# EAGLE board uBlox GPS Cape (EAGLE 7.1.0)
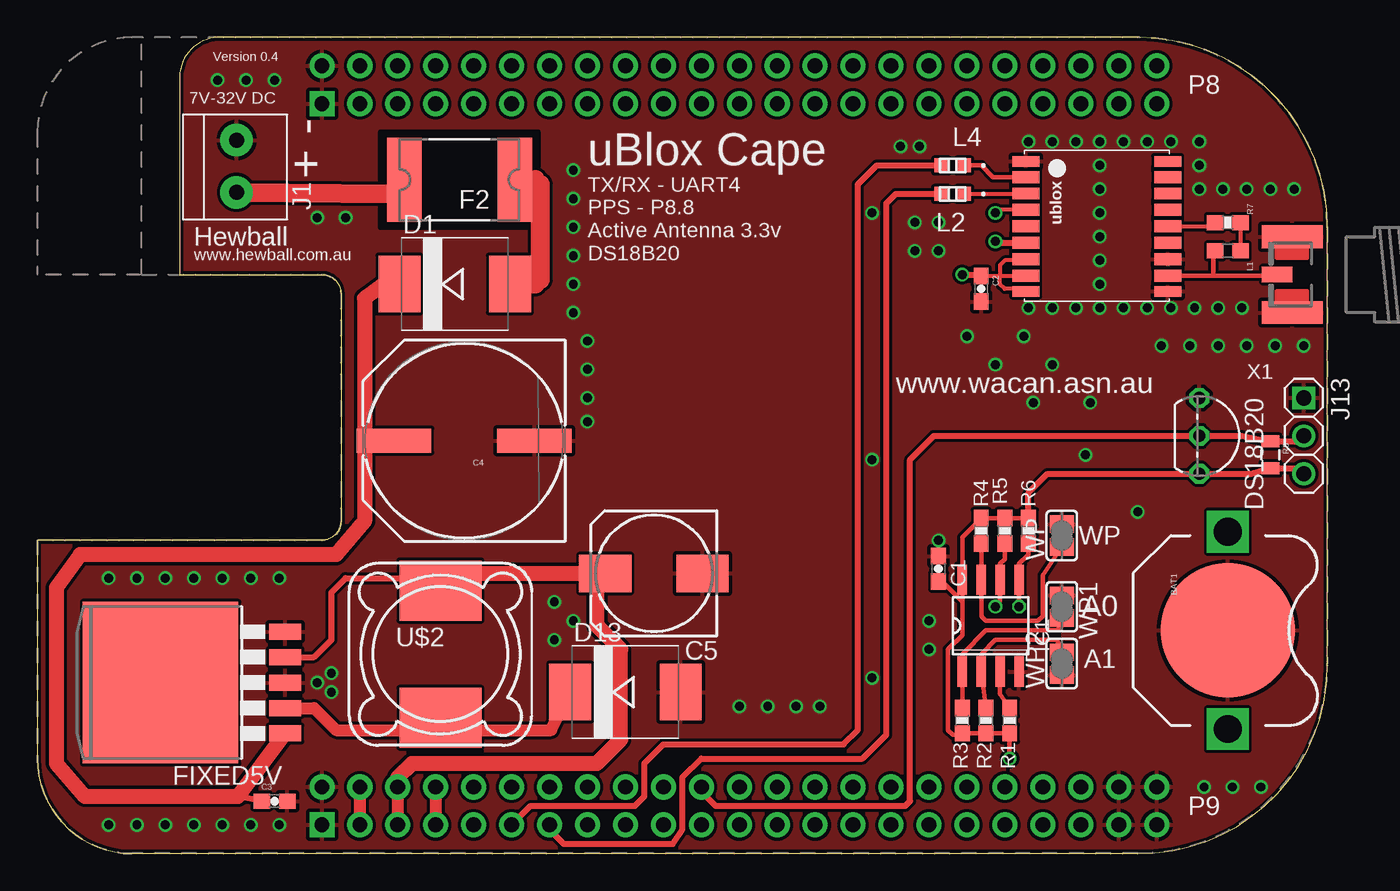
[diagram p0: board, top side]
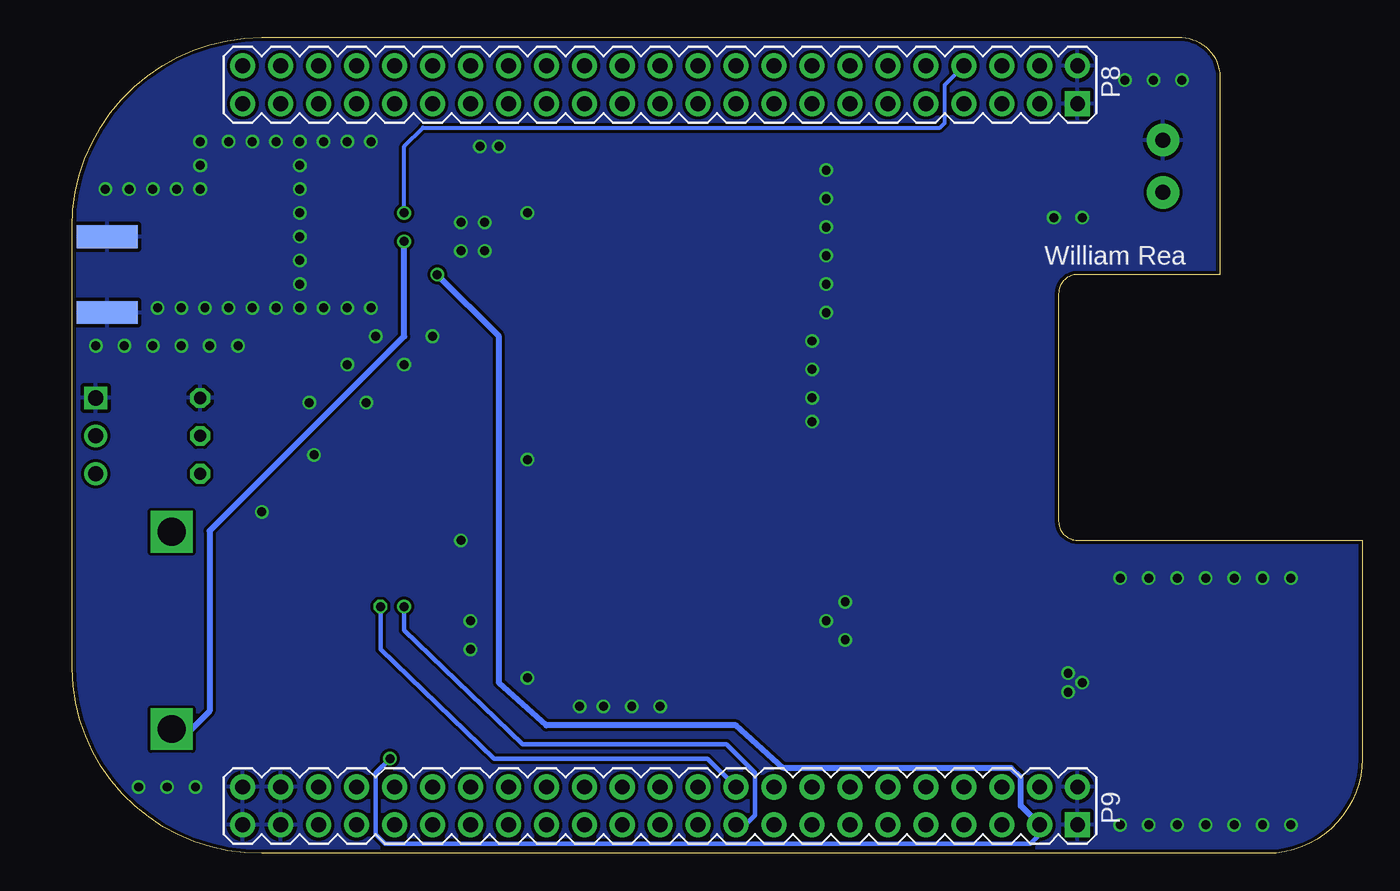
[diagram p1: board, bottom side, seen from below]

Size 86.36 x 54.61 mm. Coordinates in mm from the lower left corner, seen from the top.
Outline: 86.36,41.91 arc90 73.66,54.61 12.06,54.61 arc90 9.53,51.75 9.53,38.73 19.05,38.73 arc-90 20.32,37.47 20.32,22.23 arc-90 19.05,20.95 0,20.95 0,6.35 arc90 6.35,0 73.66,0 arc90 86.36,12.38 86.36,42.23
Copper layers (1*16): Top 0.035mm / dielectric 1.5mm / Bottom 0.035mm
Design rules "Elecrow_2-layer_eagle_rule-2": minimum track width 6mil, minimum drill 12mil, track to track 6mil, track to pad 6mil, pad to pad 6mil, via to via 6mil, smd to smd 0mil, copper to edge 10mil, drill to drill 10mil, minimum pad ring 10mil, minimum via ring 6mil, stop-mask expansion 2mil, vias tented up to drill 100mil, thermal gap 10mil
Net classes: 0 default: width 0.152 mm, drill 0.406 mm, clearance 0.152 mm; 2 gnd: width 0.152 mm, drill 0.406 mm, clearance 0.203 mm; 5 3.3v: width 0.152 mm, drill 0.406 mm, clearance 0.152 mm

## Footprints (pad centres in the part's own frame; a part is rotated, then mirrored left to right if it is on the bottom)
BATTCON_12MM_PTH = smd 9 x 9: GND 0,0 | drill 1.854 square: VCC@1 6.604,0; VCC@2 -6.604,0
BB_CAPE_TOP = drill 1 pad 1.676 square: P8.1 50.165,19.05; P9.1 1.905,19.05 | drill 1 pad 1.676: P8.2 52.705,19.05; P8.3 50.165,21.59; P8.4 52.705,21.59; P8.5 50.165,24.13; P8.6 52.705,24.13; P8.7 50.165,26.67; P8.8 52.705,26.67; P8.9 50.165,29.21; P8.10 52.705,29.21; P8.11 50.165,31.75; P8.12 52.705,31.75; P8.13 50.165,34.29; P8.14 52.705,34.29; P8.15 50.165,36.83; P8.16 52.705,36.83; P8.17 50.165,39.37; P8.18 52.705,39.37; P8.19 50.165,41.91; P8.20 52.705,41.91; P8.21 50.165,44.45; P8.22 52.705,44.45; P8.23 50.165,46.99; P8.24 52.705,46.99; P8.25 50.165,49.53; P8.26 52.705,49.53; P8.27 50.165,52.07; P8.28 52.705,52.07; P8.29 50.165,54.61; P8.30 52.705,54.61; P8.31 50.165,57.15; P8.32 52.705,57.15; P8.33 50.165,59.69; P8.34 52.705,59.69; P8.35 50.165,62.23; P8.36 52.705,62.23; P8.37 50.165,64.77; P8.38 52.705,64.77; P8.39 50.165,67.31; P8.40 52.705,67.31; P8.41 50.165,69.85; P8.42 52.705,69.85; P8.43 50.165,72.39; P8.44 52.705,72.39; P8.45 50.165,74.93; P8.46 52.705,74.93; P9.2 4.445,19.05; P9.3 1.905,21.59; P9.4 4.445,21.59; P9.5 1.905,24.13; P9.6 4.445,24.13; P9.7 1.905,26.67; P9.8 4.445,26.67; P9.9 1.905,29.21; P9.10 4.445,29.21; P9.11 1.905,31.75; P9.12 4.445,31.75; P9.13 1.905,34.29; P9.14 4.445,34.29; P9.15 1.905,36.83; P9.16 4.445,36.83; P9.17 1.905,39.37; P9.18 4.445,39.37; P9.19 1.905,41.91; P9.20 4.445,41.91; P9.21 1.905,44.45; P9.22 4.445,44.45; P9.23 1.905,46.99; P9.24 4.445,46.99; P9.25 1.905,49.53; P9.26 4.445,49.53; P9.27 1.905,52.07; P9.28 4.445,52.07; P9.29 1.905,54.61; P9.30 4.445,54.61; P9.31 1.905,57.15; P9.32 4.445,57.15; P9.33 1.905,59.69; P9.34 4.445,59.69; P9.35 1.905,62.23; P9.36 4.445,62.23; P9.37 1.905,64.77; P9.38 4.445,64.77; P9.39 1.905,67.31; P9.40 4.445,67.31; P9.41 1.905,69.85; P9.42 4.445,69.85; P9.43 1.905,72.39; P9.44 4.445,72.39; P9.45 1.905,74.93; P9.46 4.445,74.93
0603-CAP = smd 1.1 x 1: 1 -0.85,0; 2 0.85,0
PANASONIC_H13 = smd 5 x 1.6: + 4.7,0; - -4.7,0
153CLV-0810 = smd 3.5 x 2.5: + 3.25,0; - -3.25,0
SMC = smd 2.8 x 3.8: A 3.7,0; C -3.7,0
TO92- = drill 0.813 octagon: 1 -2.54,0; 2 0,0; 3 2.54,0
2920 = smd 2.3 x 5.6: 1 -3.7,0; 2 3.7,0
TO263-5 = smd 1.067 x 2.159: 1 -3.404,-5.791; 2 -1.702,-5.791; 3 0,-5.791; 4 1.702,-5.791; 5 3.404,-5.791 | smd 10.8 x 10.41: 6 0,2.54
SO08 = smd 0.66 x 2.032: 1 -1.905,-3.073; 2 -0.635,-3.073; 3 0.635,-3.073; 4 1.905,-3.073; 5 1.905,3.073; 6 0.635,3.073; 7 -0.635,3.073; 8 -1.905,3.073
1X2-3.5MM = drill 1 pad 2.184: 1 1.8,0; 2 -1.7,0
HEADER_1X3 = drill 1.016 square: 1 0,0 | drill 1.016: 2 2.54,0; 3 5.08,0
0603 = smd 1.1 x 1: 1 -0.85,0; 2 0.85,0
IND_BLM18_0603 = smd 0.965 x 0.94: 1 0.749,0; 2 -0.749,0
0603-RES = smd 1.1 x 1: 1 -0.85,0; 2 0.85,0
0805 = smd 0.8 x 1.2: 1 -0.9,0; 2 0.9,0
UBLOX_MAX = smd 1.8 x 0.7: 1_GND 4.95,-4.4; 9_V_RESET 4.95,4.3; 10_GND -4.55,4.3; 18_RESERVED -4.55,-4.4 | smd 1.8 x 0.8: 2_TXD1 4.95,-3.35; 3_RXD1 4.95,-2.25; 4_TIMEPULSE 4.95,-1.15; 5_EXTINT0 4.95,-0.05; 6_V_BCKP 4.95,1.05; 7_VCC_IO 4.95,2.15; 8_VCC 4.95,3.25; 11_RF_IN -4.55,3.25; 12_GND -4.55,2.15; 13_ANTON -4.55,1.05; 14_VCC_RF -4.55,-0.05; 15_RESERVED -4.55,-1.15; 16_SDA2 -4.55,-2.25; 17_SCL2 -4.55,-3.35
MSS1260 = smd 5.5 x 4: P$1 0,4.25; P$2 0,-4.25
SJ = smd 1.168 x 1.6: 1 -0.762,0; 2 0.762,0
SMA_EDGELAUNCH_UFL = smd 4.064 x 1.524: GND@1 2.032,-2.54; GND@2 2.032,2.54 | smd 4.064 x 1.524 bottom: GND@3 2.032,2.54; GND@4 2.032,-2.54 | smd 2.032 x 1.016: P 3.048,0

## Placement (x,y rotation side)
BAT1  [BATTCON_12MM_PTH]  79.69,14.92 270 top
BB1  BBH2  [BB_CAPE_TOP]  0,0 90 bottom
C1  0.1uF  [0603-CAP]  60.33,19.05 90 top
C2  0.1uF  [0603-CAP]  63.18,37.78 270 top
C3  0.1uF  [0603-CAP]  15.88,3.49 0 top
C4  680uF  [PANASONIC_H13]  28.57,27.62 180 top
C5  220uF  [153CLV-0810]  41.27,18.73 180 top
D1  SS34  [SMC]  27.94,38.1 0 top
D13  SS34  [SMC]  39.37,10.79 0 top
DS18B20  DS18B20  [TO92-]  77.79,27.94 270 top
F2  PTC  [2920]  28.26,45.09 180 top
FIXED5V  LM2596SX-5.0  [TO263-5]  10.79,11.43 90 top
IC1  24LC256  [SO08]  63.82,15.24 0 top
J1  1X2-3.5MM  [1X2-3.5MM]  13.34,46.04 270 top
J13  [HEADER_1X3]  84.77,30.48 270 top
L1  [0603]  79.69,40.32 0 top
L2  [IND_BLM18_0603]  61.28,44.13 180 top
L4  [IND_BLM18_0603]  61.28,46.04 180 top
R1  5.6k  [0603-RES]  65.09,8.89 270 top
R2  5.6k  [0603-RES]  63.5,8.89 270 top
R3  5.6k  [0603-RES]  61.91,8.89 270 top
R4  5.6k  [0603-RES]  63.18,21.59 90 top
R5  5.6k  [0603-RES]  64.77,21.59 90 top
R6  5.6k  [0603-RES]  66.36,21.59 90 top
R7  22  [0603-RES]  79.69,42.21 0 top
R8  4K7  [0805]  82.55,26.67 270 top
U$1  UBLOX_MAX  [UBLOX_MAX]  71.12,41.91 180 top
U$2  33uH  [MSS1260]  26.99,13.34 0 top
WP  [SJ]  68.58,21.27 90 top
WP1  [SJ]  68.58,16.51 270 top
WP2  [SJ]  68.58,12.7 90 top
X1  [SMA_EDGELAUNCH_UFL]  86.04,38.73 180 top

## Library data of the parts
BAT1 = SparkFun-Electromechanical; MPN: BK-890
BB1 IC1 J13 = logic-supply
C1 C4 = SparkFun-Capacitors
C2 = SparkFun-Capacitors; MPN: CC0805KRX7R9BB104
C3 R1-R6 = SparkFun
C5 = rcl
D1 D13 = diode
DS18B20 = 1wire
F2 = _hhn_PtcFuses_Siba_r500
FIXED5V = national-semiconductor; MF: NATIONAL SEMICONDUCTOR; MPN: LM2596S-ADJ/NOPB; OC_FARNELL: 9494367; OC_NEWARK: 41K3842
J1 X1 = adafruit
L1 = SparkFun-Passives; MPN: LBR2012T220K
L2 L4 = wrea; MANUFACTURER_PART_NUMBER: BLM18HG102SN1D; MPN: BLM18HG102SN1D; VENDOR: MURATA
R7 = SparkFun-Resistors; MPN: RMCF0805JT22R0
R8 = SparkFun-Resistors
U$1 = ava; MPN: MAX-7Q
U$2 = inductor-coilcraft
WP WP1 WP2 = Jumper Solder

## Nets
3.3V: BB1.P9.3 BB1.P9.4 C1.1 C2.1 DS18B20.3 IC1.8 J13.3 R1.2 R2.2 R3.2 R4.2 R5.2 R6.2 R8.2 U$1.7_VCC_IO U$1.8_VCC U$1.9_V_RESET
5V: BB1.P9.7 BB1.P9.8
DCIN: F2.2 J1.1
GND [gnd]: BAT1.GND BB1.P8.1 BB1.P8.2 BB1.P9.1 BB1.P9.2 BB1.P9.43 BB1.P9.44 BB1.P9.45 BB1.P9.46 C1.2 C2.2 C3.2 C4.- C5.- D13.A DS18B20.1 FIXED5V.3 FIXED5V.5 IC1.4 J1.2 J13.1 U$1.1_GND U$1.10_GND U$1.12_GND WP1.1 WP2.1 WP.2 X1.GND@1 X1.GND@2 X1.GND@3 X1.GND@4
N$3: BB1.P8.4
N$4: BB1.P8.6
N$6: BB1.P8.10
N$7: BB1.P8.12
N$8: BB1.P8.14
N$9: BB1.P8.16
N$10: BB1.P8.18
N$11: BB1.P8.20
N$12: BB1.P8.22
N$13: BB1.P8.24
N$14: BB1.P8.26
N$15: BB1.P8.28
N$16: BB1.P8.30
N$17: BB1.P8.32
N$18: BB1.P8.34
N$19: BB1.P8.36
N$20: BB1.P8.38
N$21: BB1.P8.40
N$22: BB1.P8.42
N$23: BB1.P8.44
N$24: BB1.P8.45
N$25: BB1.P8.43
N$26: BB1.P8.41
N$27: BB1.P8.39
N$28: BB1.P8.37
N$29: BB1.P8.35
N$30: BB1.P8.33
N$31: BB1.P8.31
N$32: BB1.P8.29
N$33: BB1.P8.27
N$34: BB1.P8.25
N$35: BB1.P8.23
N$36: BB1.P8.21
N$37: BB1.P8.19
N$38: BB1.P8.17
N$39: BB1.P8.15
N$40: BB1.P8.13
N$41: BB1.P8.11
N$42: BB1.P8.9
N$43: BB1.P8.7
N$44: BB1.P8.5
N$45: BB1.P8.3
N$46: BB1.P8.46
N$49: BB1.P9.41
N$50: BB1.P9.39
N$51: BB1.P9.37
N$52: BB1.P9.35
N$53: BB1.P9.33
N$54: BB1.P9.31
N$55: BB1.P9.29
N$56: BB1.P9.27
N$57: BB1.P9.25
N$58: BB1.P9.23
N$59: BB1.P9.21
N$61: BB1.P9.17
N$62: BB1.P9.15
N$63: BB1.P9.13 L2.1
N$64: BB1.P9.11 L4.1
N$65: BB1.P9.9
N$74: BB1.P9.10
N$75: BB1.P9.12
N$76: BB1.P9.14
N$77: BB1.P9.16
N$78: BB1.P9.18
N$80: BB1.P9.22 DS18B20.2 J13.2 R8.1
N$81: BB1.P9.24
N$82: BB1.P9.26
N$83: BB1.P9.28
N$84: BB1.P9.30
N$85: BB1.P9.32
N$86: BB1.P9.34
N$87: BB1.P9.36
N$88: BB1.P9.38
N$89: BB1.P9.40
N$90: BB1.P9.42
N$96: D13.C FIXED5V.2 U$2.P$2
N$97: D1.A F2.1
N$232: IC1.1 R3.1 WP1.2
N$233: IC1.2 R2.1 WP2.2
N$234: IC1.3 R1.1
N$235: R7.1 U$1.14_VCC_RF
N$375: L1.2 R7.2
N$377: BAT1.VCC@1 U$1.6_V_BCKP
N$382: L2.2 U$1.3_RXD1
N$386: L4.2 U$1.2_TXD1
RF: L1.1 U$1.11_RF_IN X1.P
SCL: BB1.P9.19 IC1.6 R5.1
SDA: BB1.P9.20 IC1.5 R6.1
TIMEPULSE: BB1.P8.8 U$1.4_TIMEPULSE
VCC: C3.1 C4.+ D1.C FIXED5V.1
VRAW: BB1.P9.5 BB1.P9.6 C5.+ FIXED5V.4 U$2.P$1
WP: IC1.7 R4.1 WP.1

## Tracks (layer width: path | path; a pad name or v marks a point on that pad's centre or on a via)
3.3V  (via drill 0.6)
  Top 0.254: C2.1 63.21,38.66 64.45,38.66 | 64.45,38.66 U$1.8_VCC | U$1.7_VCC_IO 66.1,39.69 64.77,39.69 64.45,39.37 64.45,38.66 | U$1.9_V_RESET 66,37.78 64.77,37.78 64.45,38.1 64.45,38.66
  Top 0.305: R6.2 R5.2 R4.2 61.91,21.17 IC1.8 61.91,16.83 | 82.6,26.04 R8.2 | v65.09,6.35 R1.2 R2.2 R3.2 61.81,7.94 61.28,7.94 60.96,8.26 60.96,13.65 61.91,14.61 61.91,16.83 | C1.1 60.54,18.2 61.91,16.83
  Top 0.406: v61.91,38.73 63.13,38.73 C2.1 | R6.2 66.36,24.13 67.63,25.4 DS18B20.3 81.28,25.4 82.23,25.72 82.5,25.72 R8.2 84.4,25.77 J13.3
  Top 0.813: BB1.P9.4 BB1.P9.3
  Bottom 0.305: BB1.P9.3 21.59,1.27 22.23,0.64 65.41,0.64 66.04,1.27 66.04,5.4 v65.09,6.35
  Bottom 0.406: BB1.P9.3 22.86,3.17 22.86,5.08 23.5,5.71 38.73,5.71 41.91,8.57 54.61,8.57 57.78,11.43 57.78,34.61 v61.91,38.73
5V
  Top 0.813: BB1.P9.8 BB1.P9.7
DCIN
  Top 1.27: J1.1 23.81,44.13 F2.2
GND  (via drill 0.6)
  Top 0.305: C1.2 v60.33,20.95 | IC1.4 65.72,12.06
  other vias: 71.12,47.62 71.12,46.04 71.12,44.45 71.12,42.86 71.12,41.27 71.12,39.69 71.12,38.1 71.12,36.51 72.71,36.51 74.3,36.51 75.88,36.51 69.53,36.51 67.94,36.51 66.36,36.51 69.53,47.62 67.94,47.62 66.36,47.62 72.71,47.62 74.3,47.62 75.88,47.62 77.15,33.97 13.97,51.75 80.01,4.45 18.73,42.55 84.77,33.97 20.64,42.55 82.87,33.97 82.55,44.45 77.79,44.45 77.79,47.62 77.79,46.04 75.25,33.97 80.96,33.97 79.06,33.97 84.14,44.45 80.96,44.45 79.38,44.45 12.06,51.75 78.11,4.45 15.88,51.75 62.23,34.61 66.67,30.16 64.14,32.7 73.66,22.86 67.94,32.7 70.48,30.16 81.92,4.45 66.04,34.61 34.61,14.29 35.88,15.56 34.61,16.83 18.73,11.43 19.68,12.06 59.69,15.56 55.88,42.86 55.88,11.75 55.88,26.35 59.69,13.65 19.68,10.79 16.19,1.91 12.38,1.91 10.48,1.91 14.29,1.91 6.67,1.91 4.76,1.91 8.57,1.91 6.67,18.41 4.76,18.41 8.57,18.41 12.38,18.41 10.48,18.41 14.29,18.41 35.88,38.1 35.88,36.2 35.88,40.01 35.88,43.81 35.88,41.91 35.88,45.72 36.83,32.38 36.83,30.48 36.83,34.29 36.83,28.89 58.74,42.23 60.33,42.23 58.74,40.32 60.33,40.32 59.05,47.31 57.78,47.31 70.17,26.67 77.47,36.51 79.06,36.51 80.64,36.51 16.19,18.41 48.9,9.84 50.8,9.84 46.99,9.84 52.39,9.84
  pour Top (isolate 0.1): 98.42,57.78 -4.76,57.78 -6.35,-9.21 98.11,-9.21 98.42,54.93
  pour Bottom (isolate 0.2): -6.67,61.28 -7.94,-13.3 102.55,-13.97 103.19,60.33
N$63
  Top 0.406: BB1.P9.13 34.29,1.59 35.24,0.64 42.55,0.64 43.18,1.59 43.18,5.08 44.45,6.35 55.24,6.35 56.83,7.94 56.83,43.5 57.47,44.13 L2.1
N$64
  Top 0.406: BB1.P9.11 33.02,3.17 40.01,3.17 40.64,3.81 40.64,6.03 41.91,7.3 53.98,7.3 54.93,8.26 54.93,44.77 56.2,46.04 L4.1
N$80
  Top 0.406: J13.2 84.4,27.57 R8.1 82.5,27.62 82.23,27.62 80.64,27.94 DS18B20.2 60.01,27.94 58.42,26.35 58.42,3.49 58.1,3.17 45.4,3.17 44.45,4.13 BB1.P9.22
N$96
  Top 0.813: FIXED5V.2 18.53,9.73 20,8.26 26.67,8.26 27.18,8.13 U$2.P$2 26.79,8.13 28.57,8.26 34.4,8.26 D13.C
N$97
  Top 1.016: 33.34,45.09 33.66,44.77 | 33.66,38.42 33.34,38.1
  Top 1.27: F2.1 33.34,45.09 | 33.66,44.77 33.66,38.42 | 33.34,38.1 D1.A
N$232
  Top 0.305: R3.1 IC1.1 61.91,13.34 63.5,14.92 68.26,14.92 68.58,15.24 WP1.2
N$233
  Top 0.305: R2.1 IC1.2 63.18,13.34 64.14,14.29 68.26,14.29 WP2.2
N$234
  Top 0.305: IC1.3 64.45,10.69 R1.1
N$235
  Top 0.254: U$1.14_VCC_RF 78.59,41.96 R7.1
N$375
  Top 0.254: R7.2 L1.2
N$377  (via drill 0.6)
  Top 0.406: v64.14,40.96 64.23,40.86 U$1.6_V_BCKP
  Bottom 0.406: v64.14,40.96 64.14,34.61 77.15,21.59 77.15,9.53 78.36,8.32 BAT1.VCC@1
N$382
  Top 0.254: L2.2 61.74,44.16 U$1.3_RXD1
N$386
  Top 0.305: U$1.2_TXD1 63.96,45.26 63.18,46.04 L4.2
RF
  Top 0.305: U$1.11_RF_IN 78.74,38.66 | 78.74,38.66 83.63,38.66 X1.P | L1.1 78.74,40.32 78.74,38.66
SCL  (via drill 0.6)
  Top 0.305: R5.1 64.77,19.68 64.45,19.37 IC1.6 64.45,16.83 v64.14,16.51
  Bottom 0.305: v64.14,16.51 64.14,14.92 56.2,7.3 42.55,7.3 40.64,5.4 40.64,2.54 41.27,1.91 BB1.P9.19
SDA  (via drill 0.6)
  Top 0.305: R6.1 66.36,20 65.72,19.37 IC1.5 v65.72,16.51
  Bottom 0.305: v65.72,16.51 65.72,13.65 58.1,6.35 43.81,6.35 BB1.P9.20
TIMEPULSE  (via drill 0.6)
  Top 0.254: U$1.4_TIMEPULSE 64.33,43.06 v64.14,42.86
  Bottom 0.254: v64.14,42.86 64.14,47.31 62.87,48.58 28.26,48.58 27.94,48.9 27.94,51.44 BB1.P8.8
VCC
  Top 0.406: 21.91,27.62 22.23,27.62 22.23,27.94 | C3.1 13.44,3.81
  Top 0.61: C4.+ 21.91,27.3 22.23,27.94
  Top 1.016: D1.C 23.18,38.1 21.91,37.15 21.91,27.62 21.91,27.3 21.91,22.23 20,20 2.86,20 1.27,17.78 1.27,6.03 3.17,3.81 13.44,3.81 FIXED5V.1 16.19,7.94
VRAW
  Top 0.406: FIXED5V.4 18.53,13.13 19.68,14.29 19.68,17.46 20.64,18.41 26.16,18.41 U$2.P$1
  Top 0.813: BB1.P9.6 BB1.P9.5 | U$2.P$1 27.43,17.59 28.89,18.73 | 37.71,18.73 C5.+
  Top 1.016: 28.89,18.73 37.15,18.73 | 37.15,18.73 37.71,18.73 | BB1.P9.6 24.13,5.08 25.08,6.03 37.47,6.03 39.05,7.62 39.05,13.65 37.47,15.24 37.47,18.41 37.15,18.73
WP
  Top 0.305: IC1.7 R4.1 63.18,15.88 63.5,15.56 66.99,15.56 67.31,15.88 67.31,18.61 WP.1

## Text on the board
tPlace: Version 0.4 | P8 | 7V-32V DC | + - | uBlox Cape | Hewball | www.hewball.com.au | TX/RX - UART4 / PPS - P8.8 / Active Antenna 3.3v / DS18B20 | www.wacan.asn.au | WP | A0 | A1 | P9
bPlace: William Rea